# EAGLE board openSX70-dongle_SEEED_v51 (EAGLE 9.2.0)
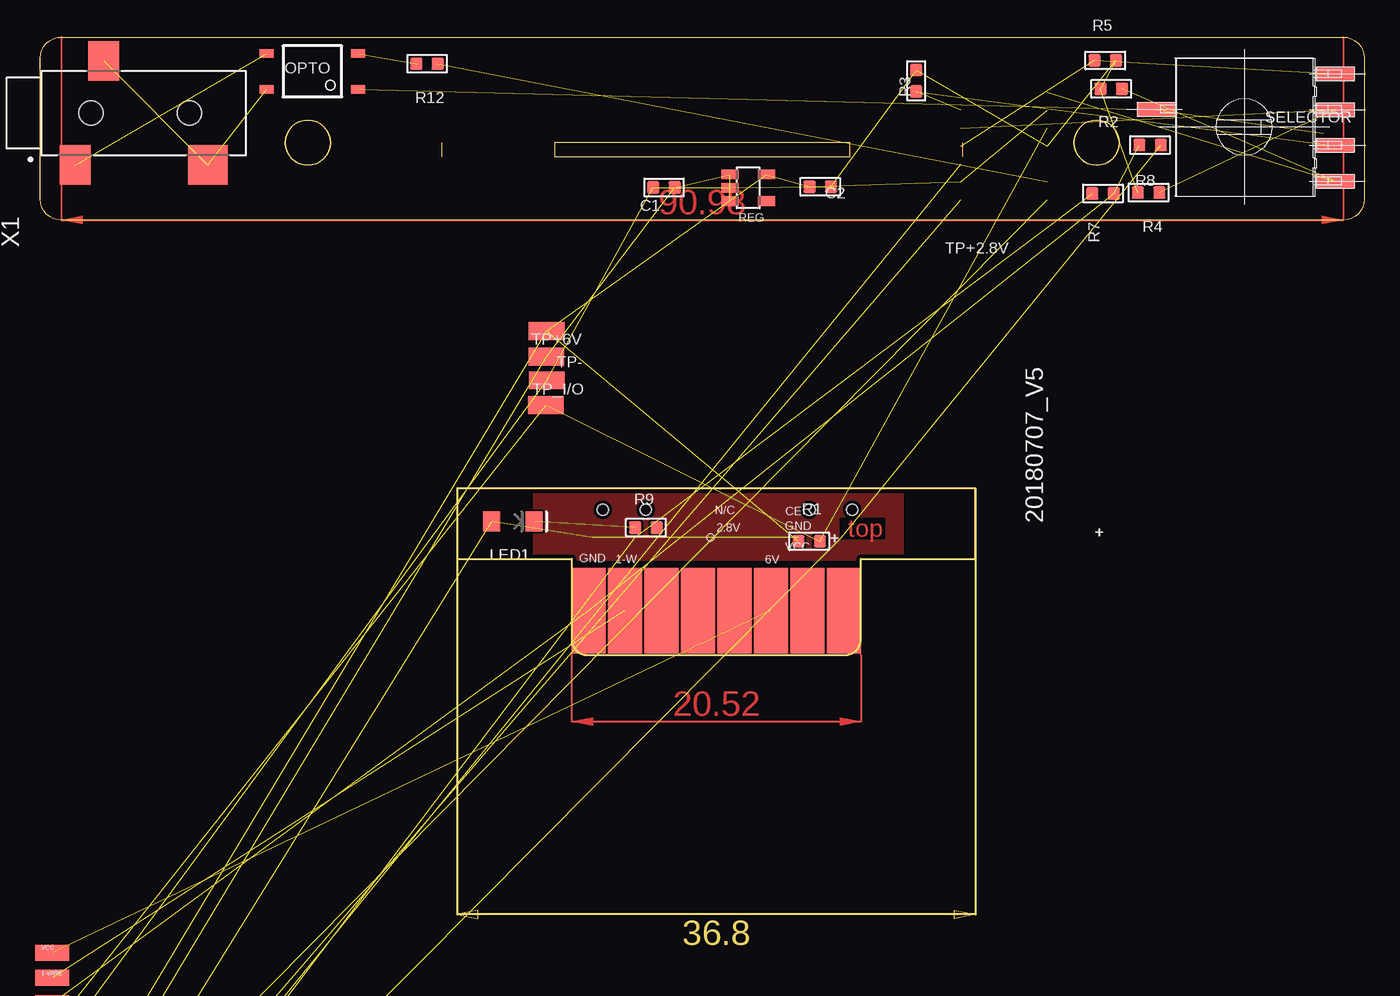
[diagram p0: board, top side]
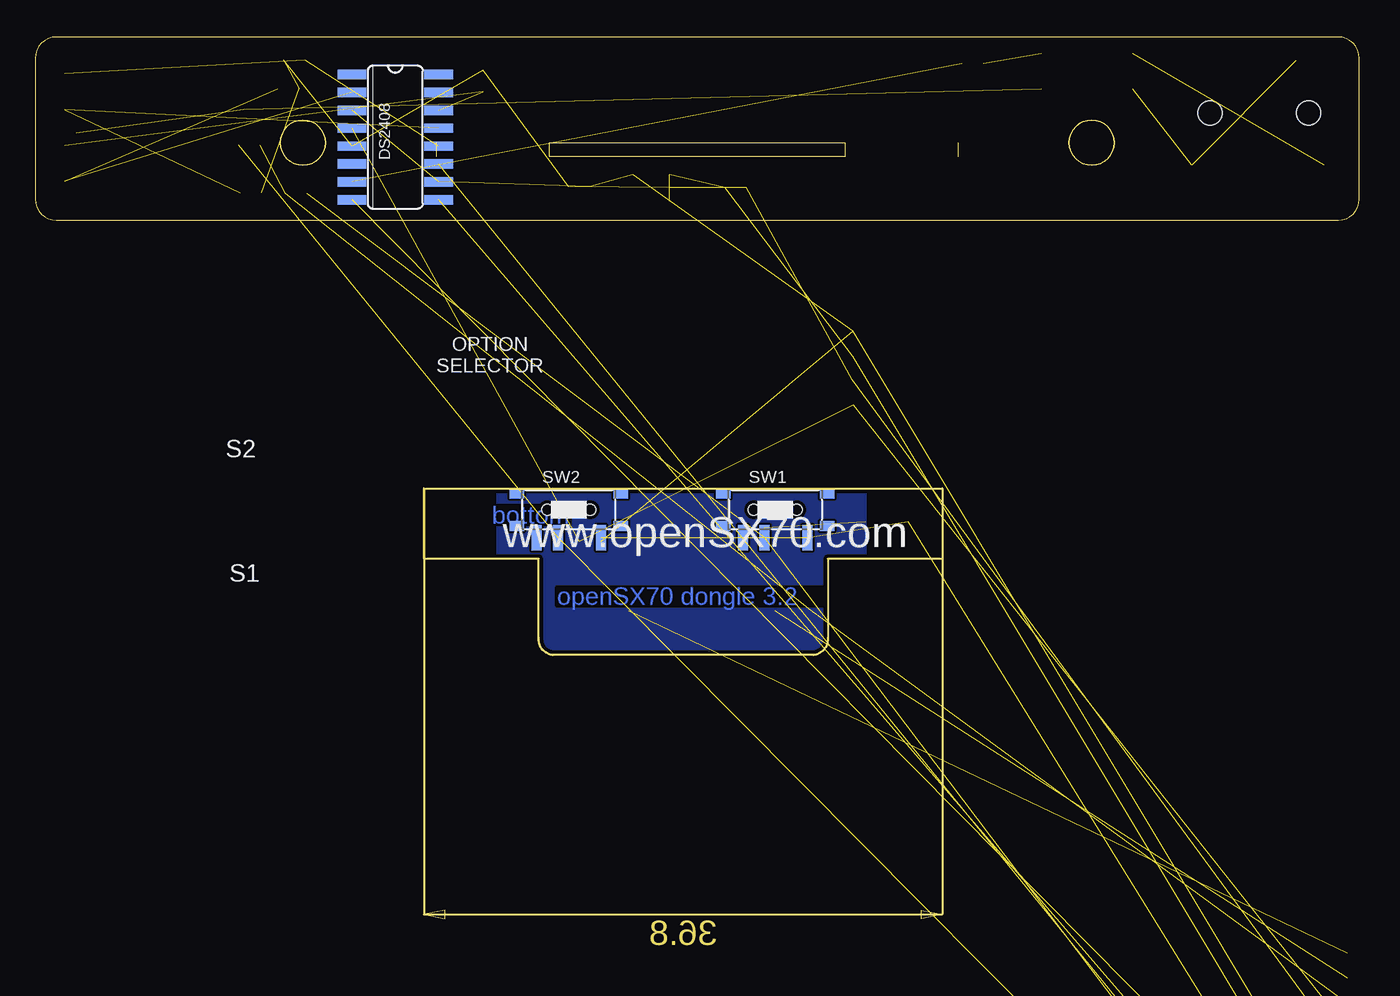
[diagram p1: board, bottom side, seen from below]

Size 94 x 43.88 mm. Coordinates in mm from the lower left corner, seen from the top.
Outline: 58.28,6.71 58.26,6.83
Outline: 58.26,6.83 58.26,1.24 arc-90 57.24,0 38.75,0 arc-90 37.74,1.24 37.74,6.83 29.6,6.83 29.6,11.83 66.4,11.83 66.4,6.83 58.26,6.83
Outline: 75,37.98 75.32,37.95 75.62,37.86 75.9,37.71 76.13,37.51
Outline: 76.13,37.51 76.33,37.28 76.48,37 76.57,36.7 76.61,36.38
Outline: 76.61,36.38 76.57,36.05 76.48,35.75 76.33,35.48 76.13,35.24
Outline: 76.13,35.24 75.9,35.05 75.62,34.9 75.32,34.81 75,34.77
Outline: 75,34.77 74.68,34.81 74.38,34.9 74.1,35.05 73.87,35.24
Outline: 73.87,35.24 73.67,35.48 73.52,35.75 73.43,36.05 73.4,36.38
Outline: 73.4,36.38 73.43,36.7 73.52,37 73.67,37.28 73.87,37.51
Outline: 73.87,37.51 74.1,37.71 74.38,37.86 74.68,37.95 75,37.98
Outline: 19,37.98 19.32,37.95 19.62,37.86 19.9,37.71 20.14,37.51
Outline: 20.14,37.51 20.33,37.28 20.48,37 20.57,36.7 20.61,36.38
Outline: 20.61,36.38 20.57,36.05 20.48,35.75 20.33,35.48 20.14,35.24
Outline: 20.14,35.24 19.9,35.05 19.62,34.9 19.32,34.81 19,34.77
Outline: 19,34.77 18.68,34.81 18.38,34.9 18.1,35.05 17.87,35.24
Outline: 17.87,35.24 17.67,35.48 17.52,35.75 17.43,36.05 17.4,36.38
Outline: 17.4,36.38 17.43,36.7 17.52,37 17.67,37.28 17.87,37.51
Outline: 17.87,37.51 18.1,37.71 18.38,37.86 18.68,37.95 19,37.98
Outline: 75,37.98 74.69,37.95 74.38,37.86 74.11,37.71 73.87,37.51
Outline: 73.87,37.51 73.66,37.27 73.52,36.99 73.43,36.69 73.4,36.38
Outline: 73.4,36.38 73.43,36.07 73.52,35.77 73.66,35.49 73.87,35.24
Outline: 73.87,35.24 74.11,35.04 74.38,34.9 74.69,34.8 75,34.77
Outline: 75,34.77 75.31,34.8 75.61,34.9 75.89,35.04 76.13,35.24
Outline: 76.13,35.24 76.33,35.49 76.48,35.77 76.57,36.07 76.61,36.38
Outline: 76.61,36.38 76.57,36.69 76.48,36.99 76.33,37.27 76.13,37.51
Outline: 76.13,37.51 75.89,37.71 75.61,37.86 75.31,37.95 75,37.98
Outline: 19,37.98 18.69,37.95 18.39,37.86 18.11,37.71 17.87,37.51
Outline: 17.87,37.51 17.66,37.27 17.52,36.99 17.43,36.69 17.4,36.38
Outline: 17.4,36.38 17.43,36.07 17.52,35.77 17.66,35.49 17.87,35.24
Outline: 17.87,35.24 18.11,35.04 18.39,34.9 18.69,34.8 19,34.77
Outline: 19,34.77 19.31,34.8 19.61,34.9 19.89,35.04 20.14,35.24
Outline: 20.14,35.24 20.33,35.49 20.48,35.77 20.57,36.07 20.61,36.38
Outline: 20.61,36.38 20.57,36.69 20.48,36.99 20.33,37.27 20.14,37.51
Outline: 20.14,37.51 19.89,37.71 19.61,37.86 19.31,37.95 19,37.98
Outline: 65.5,35.38 65.5,36.38
Outline: 28.5,36.38 28.5,35.38
Outline: 1.51,43.88 92.49,43.88 92.79,43.85 93.08,43.76 93.33,43.62 93.56,43.44 93.74,43.21 93.88,42.96 93.97,42.67 94,42.37 94,32.39 93.97,32.08 93.88,31.8 93.74,31.55 93.56,31.32 93.33,31.14 93.08,31 92.79,30.91 92.49,30.88 1.51,30.88 1.2,30.91 0.92,31 0.67,31.14 0.44,31.32 0.26,31.55 0.12,31.8 0.03,32.08 0,32.39 0,42.37 0.03,42.67 0.12,42.96 0.26,43.21 0.44,43.44 0.67,43.62 0.92,43.76 1.2,43.85 1.51,43.88
Outline: 36.5,35.38 57.5,35.38 57.5,36.38 36.5,36.38 36.5,35.38
Copper layers (1*16): Top 0.035mm / dielectric 1.5mm / Bottom 0.035mm
Design rules "SeeedStudio_2layer_DRU_no_angle_20140221": minimum track width 6mil, minimum drill 12mil, track to track 6mil, track to pad 6mil, pad to pad 6mil, via to via 6mil, smd to smd 0mil, copper to edge 10mil, drill to drill 10mil, minimum pad ring 10mil, minimum via ring 6mil, stop-mask expansion 2mil, vias tented up to drill 100mil, thermal gap 10mil
Net classes: 0 GND: width 0.305 mm; 1 VCC: width 0.254 mm; 2 2.8V: width 0.254 mm

## Footprints (pad centres in the part's own frame; a part is rotated, then mirrored left to right if it is on the bottom)
SX70-S-PAD2 = smd 2.413 x 1.143: P$1 0.01,0.087
C0603 = smd 0.889 x 0.889: 1 0,0.762; 2 0,-0.762
SO16 = smd 0.66 x 2.032: 1 -4.445,-3.073; 2 -3.175,-3.073; 3 -1.905,-3.073; 4 -0.635,-3.073; 5 0.635,-3.073; 6 1.905,-3.073; 7 3.175,-3.073; 8 4.445,-3.073; 9 4.445,3.073; 10 3.175,3.073; 11 1.905,3.073; 12 0.635,3.073; 13 -0.635,3.073; 14 -1.905,3.073; 15 -3.175,3.073; 16 -4.445,3.073
LED-1206 = smd 1.2 x 1.4: A -1.5,0; C 1.5,0
SO-4 = smd 1 x 0.6: 1 -3.24,0.635; 2 -3.24,-1.905; 3 3.24,-1.905; 4 3.24,0.635
R0603 = smd 0.889 x 0.889: 1 0,0.762; 2 0,-0.762
SOT-23-5 = smd 0.69 x 1.2: 1 -0.95,-1.3; 2 0,-1.3; 3 0.95,-1.3; 4 0.95,1.3; 5 -0.95,1.3
A6RS-161RS = smd 1 x 2.7: 1 8.89,-1.397; 2 6.35,-1.397; 4 3.81,-1.397; 8 1.27,-1.397; C 6.35,11.303
SW7-SMD-L6.7X2.7X3.2MM = smd 1.8 x 0.7: A 1.978,2.286; B 1.978,-2.286; COM 1.978,-0.762 | smd 0.7 x 1.016: SS1 -1.15,-3.683; SS2 1.15,-3.683; SS3 1.15,3.683; SS4 -1.15,3.683 | hole 0.813: 0,-1.524; 0,1.524
SMD1,27-2,54 = smd 1.27 x 2.54: 1 0,0
FLASH-EDGE-8 = smd 2.4 x 6.09: P$1 -9.065,0; P$2 -6.475,0; P$3 -3.885,0; P$4 -1.295,0; P$5 1.295,0; P$6 3.885,0; P$7 6.475,0; P$8 9.065,0
CUI_SJ-3523-SMT-TR = smd 2.2 x 2.8: 1 -1.1,-3.7; 3 0.9,3.7 | smd 2.8 x 2.8: 2 8.3,-3.7 | hole 1.7: 0,0; 7,0

## Placement (x,y rotation side)
1-WIRE  SX70-S-PAD-NEW  [SX70-S-PAD2]  0.84,-23.01 0 top  (outside the outline)
1-WIRE-H  SX70-S-PAD-NEW  [SX70-S-PAD2]  0.84,-26.61 0 top  (outside the outline)
2.8V-H  SX70-S-PAD-NEW  [SX70-S-PAD2]  0.84,-35.61 0 top  (outside the outline)
2.8V-V  SX70-S-PAD-NEW  [SX70-S-PAD2]  0.84,-41.01 0 top  (outside the outline)
C1  1uf  [C0603]  44.28,33.19 270 top
C2  1uf  [C0603]  55.38,33.25 90 top
DS2408  DS2408  [SO16]  68.44,36.77 270 bottom
GND  SX70-S-PAD-NEW  [SX70-S-PAD2]  0.84,-24.81 0 top  (outside the outline)
GND-H  SX70-S-PAD-NEW  [SX70-S-PAD2]  0.84,-28.41 0 top  (outside the outline)
LED1  Yellow  [LED-1206]  33.55,9.49 0 top
LED-H  SX70-S-PAD-NEW  [SX70-S-PAD2]  0.84,-39.21 0 top  (outside the outline)
OPTO  TLP127  [SO-4]  19.32,40.81 180 top
R1  4.7K  [R0603]  54.59,8.08 270 top
R2  100K  [R0603]  76.04,40.2 270 top
R3  100K  [R0603]  62.19,40.77 0 top
R4  100K  [R0603]  78.69,32.84 90 top
R5  100K  [R0603]  75.61,42.22 270 top
R7  100K  [R0603]  75.45,32.76 90 top
R8  100K  [R0603]  78.79,36.21 270 top
R9  220R  [R0603]  43,9.05 270 top
R12  220R  [R0603]  27.46,41.98 270 top
REG  NCP4688  [SOT-23-5]  50.27,33.18 270 top
S1-H  SX70-S-PAD-NEW  [SX70-S-PAD2]  0.84,-42.81 0 top  (outside the outline)
S1-V  SX70-S-PAD-NEW  [SX70-S-PAD2]  0.84,-46.41 0 top  (outside the outline)
S2-H  SX70-S-PAD-NEW  [SX70-S-PAD2]  0.84,-44.61 0 top  (outside the outline)
S2-V  SX70-S-PAD-NEW  [SX70-S-PAD2]  0.84,-48.21 0 top  (outside the outline)
SELECTOR  SELECTOR-4-1-SMD-A6RS  [A6RS-161RS]  90.49,32.37 90 top
SW1  MK-12C02 G1.5  [SW7-SMD-L6.7X2.7X3.2MM]  41.46,10.32 270 bottom
SW2  MK-12C02 G1.5  [SW7-SMD-L6.7X2.7X3.2MM]  56.12,10.32 270 bottom
TP+2.8V  [SMD1,27-2,54]  35.96,22.99 90 top
TP+6V  [SMD1,27-2,54]  35.93,21.18 90 top
TP-  [SMD1,27-2,54]  35.97,19.51 90 top
TP_I/O  [SMD1,27-2,54]  35.89,17.74 90 top
U$1  FLASH-EDGE-CONNECTOR  [FLASH-EDGE-8]  48,3.15 0 top
VCC  SX70-S-PAD-NEW  [SX70-S-PAD2]  0.84,-21.21 0 top  (outside the outline)
VCC-H  SX70-S-PAD-NEW  [SX70-S-PAD2]  0.84,-37.41 0 top  (outside the outline)
X1  JACK-SMD-SJ-3523-SMT-TR  [CUI_SJ-3523-SMT-TR]  3.6,38.49 0 top

## Library data of the parts
1-WIRE 1-WIRE-H 2.8V-H 2.8V-V GND GND-H LED-H OPTO REG S1-H S1-V S2-H S2-V VCC VCC-H = openSX70
C1 C2 = Seeed-Capacitor; MPN: CC0603KRX7R8BB105
DS2408 = DS2408-joaco
LED1 = SparkFun-LED; PROD_ID: DIO-09909
R1 = Seeed-Resistor; MPN: RC0603JR-074K7L
R2-R5 R7 R8 = Seeed-Resistor; MPN: RC0603FR-07100KL
R9 R12 = Seeed-Resistor; MPN: RC0603JR-07220RL
SELECTOR = _openSX70
SW1 SW2 = Seeed-Switch; MPN: MK-12C02 G1.5
TP+2.8V TP+6V TP- TP_I/O = wirepad
U$1 = SX70-flash
X1 = _openSX70; AVAILABILITY: Unavailable; CUI_PURCHASE_URL: https://www.cui.com/product/interconnect/audio-connectors/3.5-mm-jacks/sj-352x-smt-series?utm_source=snapeda.com&utm_medium=referral&utm_campaign=snapedaBOM; DESCRIPTION: SJ Series 3.5 mm 12 V SMT Right Angle Stereo Audio Jack; MF: CUI Inc.; MP: SJ-3523-SMT-TR; PACKAGE: LGA-10 STMicroelectronics; PRICE: None

## Nets
1-WIRE-H: 1-WIRE-H.P$1 DS2408.4 R1.1 TP_I/O.1
1-WIRE-V: 1-WIRE.P$1 U$1.P$2
2.8V: OPTO.1 SELECTOR.C
2.8V-H: 2.8V-H.P$1 C2.1 DS2408.3 DS2408.10 R1.2 REG.5 TP+2.8V.1
2.8V-V: 2.8V-V.P$1 LED1.A SW1.A SW2.A
GND-H: C1.2 C2.2 DS2408.5 GND-H.P$1 R2.2 R3.1 R4.1 R5.1 REG.2 TP-.1
GND-V: GND.P$1 R7.2 R8.2 U$1.P$1
LED-H: DS2408.8 LED-H.P$1
LED-V: R9.1
N$1: OPTO.3 X1.1
N$2: LED1.C R9.2
N$3: DS2408.2 R2.1 SELECTOR.8
N$4: DS2408.14 R3.2 SELECTOR.4
N$5: DS2408.13 R4.2 SELECTOR.2
N$9: OPTO.4 X1.2 X1.3
N$10: OPTO.2 R12.2
N$11: DS2408.7 R12.1
N$13: DS2408.12 R5.2 SELECTOR.1
S1-H: DS2408.9 S1-H.P$1
S1-V: R7.1 S1-V.P$1 SW1.COM
S2-H: DS2408.11 S2-H.P$1
S2-V: R8.1 S2-V.P$1 SW2.COM
VCC-H: C1.1 REG.1 REG.3 TP+6V.1 VCC-H.P$1
VCC-V: U$1.P$6 VCC.P$1

## Tracks (layer width: path | path; a pad name or v marks a point on that pad's centre or on a via)
1-WIRE-H  (3 unrouted)
1-WIRE-V  (1 unrouted)
2.8V  (2 unrouted)
2.8V-H  (6 unrouted)
2.8V-V  (3 unrouted)
GND
  pour Top: 35.04,11.79 61.21,11.84 61.21,6.76 35.04,6.71
  pour Bottom: 35.04,11.88 35.04,6.71 37.58,6.71 37.58,0.36 57.9,0.36 57.9,6.71 61.18,6.66 61.18,11.83
GND-H  (9 unrouted)
GND-V  (3 unrouted)
LED-H  (1 unrouted)
N$1  (1 unrouted)
N$2  (1 unrouted)
N$3  (2 unrouted)
N$4  (2 unrouted)
N$5  (2 unrouted)
N$9  (2 unrouted)
N$10  (1 unrouted)
N$11  (1 unrouted)
N$13  (2 unrouted)
S1-H  (1 unrouted)
S1-V  (2 unrouted)
S2-H  (1 unrouted)
S2-V  (2 unrouted)
VCC-H  (4 unrouted)
VCC-V  (1 unrouted)
(copper drawn outside any net)
  shapes: Top area x2

## Text on the board
Top: top
Bottom: bottom | openSX70 dongle 3.2
tPlace: 20180707_V5 | + | +
bPlace: www.openSX70.com
tNames: N/C | CE | 2.8V | GND | VCC | GND | 1-W | 6V
bNames: OPTION / SELECTOR | S2 | S1